# Altium PCB Relay Control.PcbDoc
Units mm, origin at the board's own origin, x right, y up, seen from the top; angles counter-clockwise.
Board outline 66.04 x 33.02 mm, 2 copper layers (Top Layer, Bottom Layer); 23 components, 10 nets, 58 pads, 4 vias.
Unrouted connection lines stored in the file: 14.
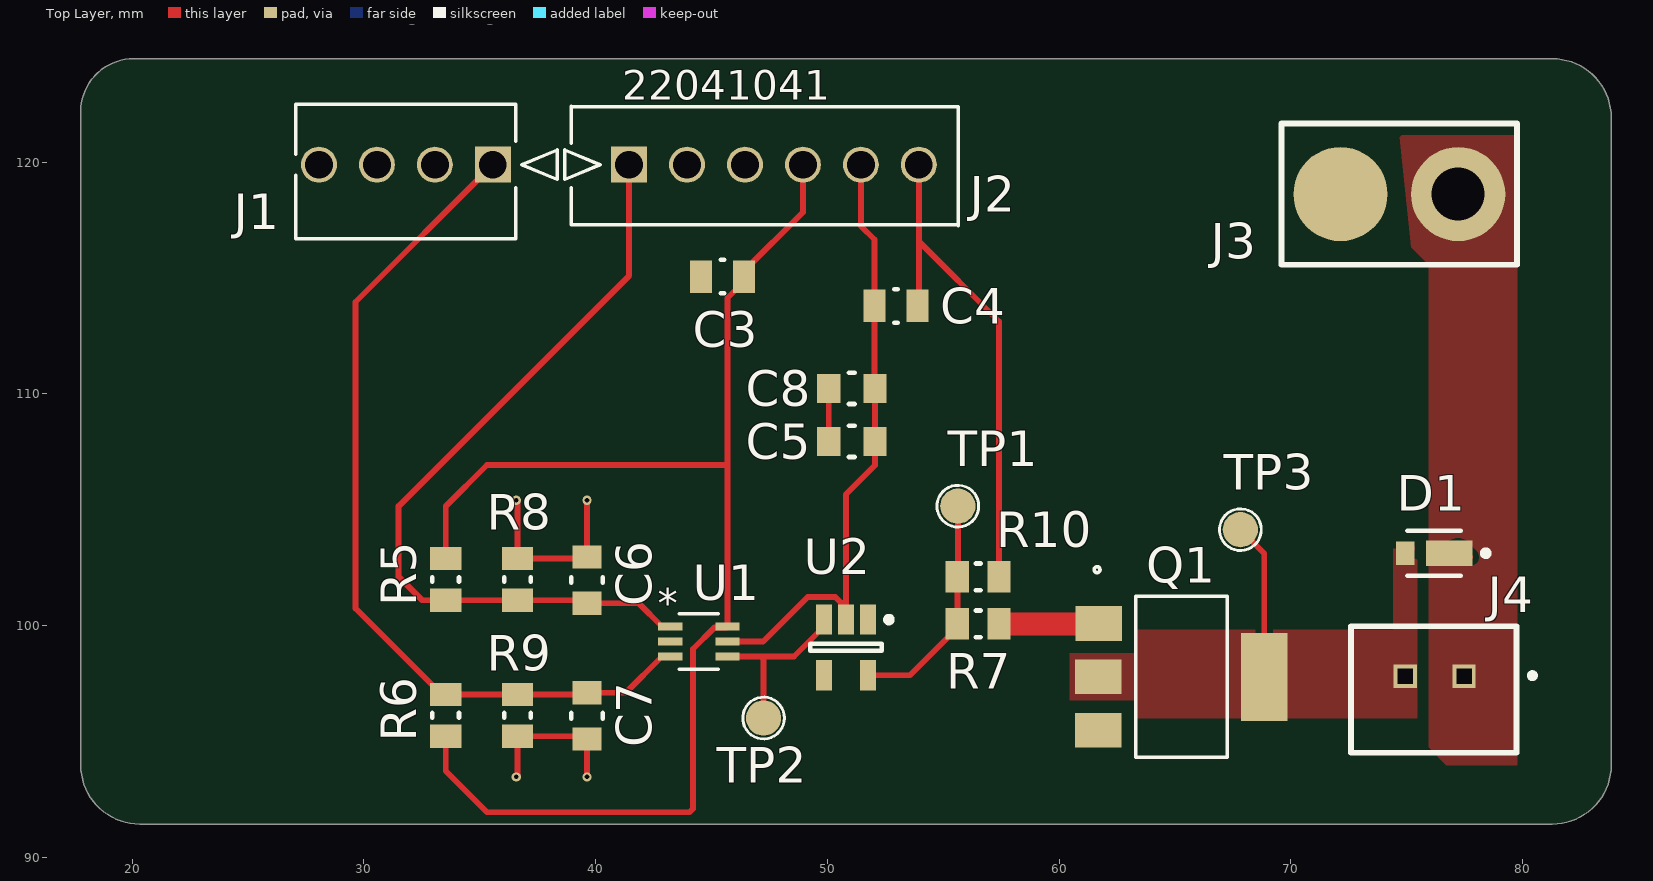
[diagram p0: Top Layer view]
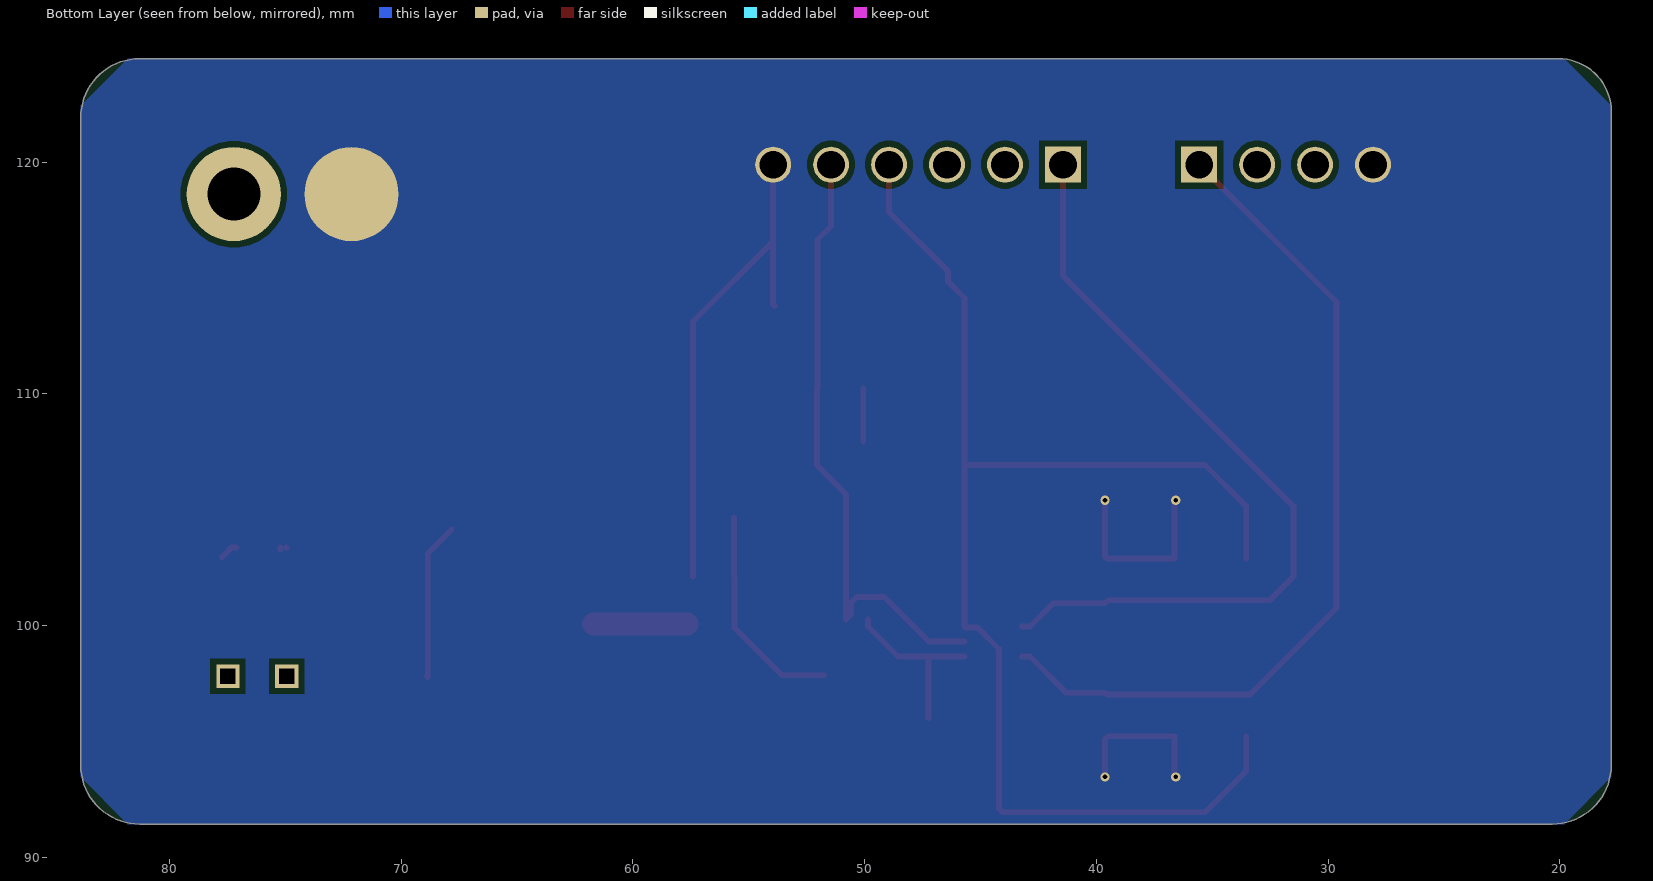
[diagram p1: Bottom Layer view, seen from below]
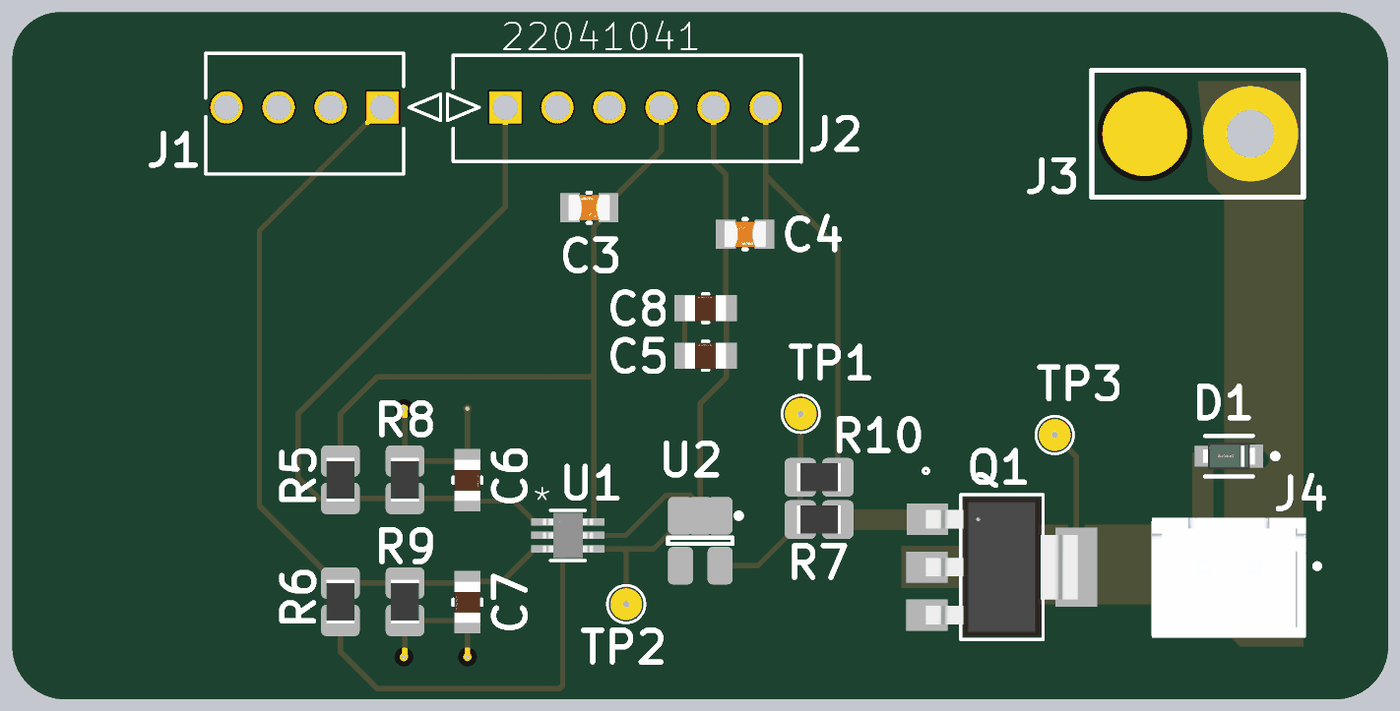
[diagram p2: 3D render of the assembled board from above, using the file's embedded part models]

## Layer stack, top to bottom
Top Solder: solder mask 0.0102, Solder Resist, Dk 3.5
Top Layer: signal copper 0.0356
Dielectric 1: dielectric 0.32, FR-4, Dk 4.8
Bottom Layer: signal copper 0.0356
Bottom Solder: solder mask 0.0102, Solder Resist, Dk 3.5

## Board outline
17.78,93.98 17.78,122.174 cw(c20.066,122.174) 20.066,124.46 81.28,124.46 cw(c81.28,121.92) 83.82,121.92 83.82,93.98 cw(c81.28,93.98) 81.28,91.44 20.32,91.44 cw(c20.32,93.98)

## Design rules (kind name [scope] priority, off if disabled: settings)
Clearance [All] p1: gap=0.254 ignorepadtopadclearanceinfootprint=FALSE except(0.127: Arc-Arc Arc-Track Track-Track SMDPad-SMDPad; 0.2: Arc-SMDPad Track-SMDPad)
DiffPairsRouting [All] p1: maxlimit=0.254 minlimit=0.254 mostfreqgap=0.254 toplayer_minwidth=0.254 toplayer_maxwidth=0.254 toplayer_prefwidth=0.254 bottomlayer_minwidth=0.254 bottomlayer_maxwidth=0.254 bottomlayer_prefwidth=0.254 maxuncoupledlength=12.7
HoleSize [IsVia] p1: absolutevalues=TRUE maxlimit=6.3 minlimit=0.15 maxpercent=80.000 minpercent=20.000
MinimumAnnularRing [All] p1: minimumring=0.254
PasteMaskExpansion [All] p1: expansion=0.254
PlaneClearance [All] p1: clearance=0.381
PlaneConnect [All] p1: pad.planeconnectstyle=Relief pad.reliefexpansion=0.508 pad.reliefentries=4 pad.reliefconductorwidth=0.254 pad.reliefairgap=0.254 via.planeconnectstyle=Direct via.reliefexpansion=0.508 via.reliefentries=4 via.reliefconductorwidth=0.254 via.reliefairgap=0.254
PolygonConnect [All] p1: connectstyle=Direct reliefconductorwidth=0.254 reliefentries=4 polygonreliefangle="90 Angle" airgapwidth=0.254
RoutingVias [All] p1: holewidth=0.2 width=0.4 viastyle="Through Hole" minholewidth=0.15 minwidth=0.25 maxholewidth=1 maxwidth=2
SMDNeckDown [All] p1: percent=300.000
SilkToSolderMaskClearance SilkscreenOverComponentPads [IsPad] p1: minsilkscreentomaskgap=0.254 clearancetoexposedcopper=TRUE
SolderMaskExpansion [All] p1: expansion=0.254 istentingtop=FALSE
SupplyNets "Schematic Supply Nets_4" [InNet('24V')] p1: voltage=0.000
SupplyNets "Schematic Supply Nets_2" [InNet('GND')] p2: voltage=0.000
SupplyNets "Schematic Supply Nets_1" [InNet('+5')] p3: voltage=0.000
SupplyNets "Schematic Supply Nets" [InNet('3V3')] p4: voltage=0.000
Width [All] p1: maxlimit=5.08 minlimit=0.127 preferedwidth=0.254 bottomlayer_minwidth=0.254 minimp=50.000000 maximp=50.000000 favimp=50.000000
24 further rules are at their usual default settings.

## Components (designator, comment, footprint, x,y, rotation, side; value= is the part's Value field where it differs from the comment)
C3 "CC0805KKX7R8BB105" FP-CC0805-0_85-MFG 45.466,115.062 r180 top value="1 uF"
C4 "CC0805KKX7R8BB105" FP-CC0805-0_85-MFG 52.954,113.792 r0 top value="1 uF"
C5 "HMK212B7104MG-T" FP-0805-L_2_0_0_1-W_1_25-MFG 51.054,107.95 r180 top
C6 "HMK212B7104MG-T" FP-0805-L_2_0_0_1-W_1_25-MFG 39.624,101.967 r90 top
C7 "HMK212B7104MG-T" FP-0805-L_2_0_0_1-W_1_25-MFG 39.624,96.103 r270 top
C8 "HMK212B7104MG-T" FP-0805-L_2_0_0_1-W_1_25-MFG 51.054,110.236 r180 top
D1 "NRVBSS14HE" FP-477AD-MFG 76.18,103.124 r180 top
J1 "4 pin Connector 2.5mm" "4 PIN CONNECTOR 2.5MM" 31.496,118.872 r0 top
J2 "6 pin Connector" "PLEASEWORK - 6 Pin connector 2.5mm spacing" 43.942,117.388 r180 top
J3 "XT60H-M" XT60H-M 74.676,118.618 r270 top
J4 "2PIN_PWR_SUPPLY" 2PIN_JST_CONNECTOR 76.2,97.79 r180 top
Q1 "FDT457N" "FDT457N MOSFET" 65.278,97.79 r270 top
R5 "RC0805FR-071KL" RESC2013X60X35NL10T20 33.528,101.992 r270 top
R6 "RC0805FR-071KL" RESC2013X60X35NL10T20 33.528,96.128 r90 top
R7 "RC0805FR-071KL" RESC2013X60X35NL10T20 56.504,100.076 r180 top
R8 "RC0805FR-0710KL" RESC2013X60X35NL10T20 36.626,101.992 r270 top
R9 "RC0805FR-0710KL" RESC2013X60X35NL10T20 36.626,96.128 r90 top
R10 "RC0805FR-071KL" RESC2013X60X35NL10T20 56.504,102.108 r180 top
TP1 "TEST_POINT" TEST_POINT 55.626,105.156 r90 top
TP2 "TEST_POINT" TEST_POINT 47.244,96.012 r90 top
TP3 "TEST_POINT" TEST_POINT 67.818,104.14 r90 top
U1 "SN74LVC1G11DCKR" "AND GATE" 44.45,99.314 r0 top
U2 "MCP1416T-E/OT" SOT-23-OT5_M 50.8,99.06 r270 top

## Footprints (in the part's own frame and the unit in brackets; to place one, negate y for a bottom-side part, rotate by r counter-clockwise, add the part's x,y. Pads: shape width x height; smd on the part's side, far side on the other; paste and mask are expansions set on the pad)
2PIN_JST_CONNECTOR [mm]
  rect 1x1 hole 0.65 square: 1(-1.27,-0.025) 2(1.27,-0.025)
  silkscreen extent -4.32,-2.18 3.61,3.28, body extent -3.67,-2.36 3.73,3.39, height 7
"4 PIN CONNECTOR 2.5MM" [mm]
  rect 1.55x1.55 / inner round 1.524 / far side rect 1.55x1.55 hole 1.2 paste-2539.97 mask+0.076: 1(4.064,1.016)
  round 1.55 / inner round 1.524 / far side round 1.55 hole 1.2 paste-2539.97 mask+0.076: 2(1.564,1.016) 3(-0.936,1.016) 4(-3.436,1.016)
  silkscreen extent -4.44,-2.18 6.84,3.62
"AND GATE" [mil]
  rect 41.5x14 smd paste+0 mask+0: 1(-48.75,25.59) 2(-48.75,0) 3(-48.75,-25.59) 4(48.75,-25.59) 5(48.75,0) 6(48.75,25.59)
  silkscreen extent -33,-48 33,48, body extent -48,-43 48,43, height 43
"FDT457N MOSFET" [mm]
  rect 1.5x2 smd paste+0 mask+0: 1(-2.3,-3.569) 2(0,-3.6) 3(2.3,-3.6)
  rect 3.8x2 smd paste+0 mask+0: 4(0,3.569)
  silkscreen extent -4.75,-3.77 3.48,1.98, body extent -3.35,-3.64 3.35,3.64, height 1.81
FP-477AD-MFG [mm]
  rect 2x1.1 smd paste+0 mask+0: 1(-0.65,0)
  rect 0.8x1 smd paste+0 mask+0: 2(1.25,0)
  silkscreen extent -2.35,-0.97 1.15,0.97, body extent -1.75,-0.8 1.75,0.8, height 0.25
FP-0805-L_2_0_0_1-W_1_25-MFG [mm]
  rect 1x1.25 smd paste+0 mask+0: 1(-1,0) 2(1,0)
  silkscreen extent -0.13,-0.67 0.13,0.67, body extent -1.6,-0.77 1.6,0.77, height 0.25
FP-CC0805-0_85-MFG [mm]
  rect 0.95x1.4 smd paste+0 mask+0: 1(-0.925,0) 2(0.925,0)
  silkscreen extent -0.08,-0.72 0.08,0.72, body extent -1.6,-1.05 1.6,1.05, height 0.25
"PLEASEWORK - 6 Pin connector 2.5mm spacing" [mm]
  rect 1.55x1.55 / inner round 1.524 / far side rect 1.55x1.55 hole 1.2 paste-2539.97 mask+0.076: 1(2.5,-2.5)
  round 1.55 / inner round 1.524 / far side round 1.55 hole 1.2 paste-2539.97 mask+0.076: 2(0,-2.5) 3(-2.5,-2.5) 4(-5,-2.5) 5(-7.5,-2.5) 6(-10,-2.5)
  silkscreen extent -11.71,-5.01 5.28,0.13
RESC2013X60X35NL10T20 [mm] "Chip Resistor, 2-Leads, Body 2.1x1.35mm, IPC Medium Density"
  rect 1x1.35 smd: 1(-0.9,0) 2(0.9,0)
  silkscreen extent -0.1,-0.58 0.1,0.58, body extent -1.05,-0.68 1.05,0.67, height 0.6
SOT-23-OT5_M [mm] "SOT23, 5-Leads, Body 2.9x1.7mm, Pitch 0.95mm, Lead Span 2.8mm, IPC Low Density"
  rect 1.3x0.7 smd: 1(-1.2,0.95) 2(-1.2,0) 3(-1.2,-0.95) 4(1.2,-0.95) 5(1.2,0.95)
  silkscreen extent -1.32,-1.55 0.15,1.98, body extent -0.9,-1.55 0.9,1.55, height 1.45
TEST_POINT [mil]
  round 60 smd paste-23.62 mask+0: 1(0,0)
  silkscreen extent -35,-35 35,35, body extent -24,-24 24,24, height 1
XT60H-M [mil]
  round 160 hole 90: 1(0,100)
  round 160 all layers, no hole: 2(0,-100)
  silkscreen extent -120,-200 120,200

## Part data
C3 C4: library part CMP-2100-03605-2, "CAP CER 1UF 25V X7R 0805", Capacitance="1 uF", Manufacturer=Yageo, Package=CC0805-0.85, Temperature="-30°C to +85°C", Temperature Characteristic=X7R, Temperature Range High=+85°C, Temperature Range Low=-30°C, Tolerance=0.1, Voltage Rating="25 V", Automotive=No, Category=Cap, ComponentLink2Description=Datasheet, ComponentLink2URL=http://www.yageo.com/documents/recent/UPY-GPHC_Y5V_6.3V-to-50V_8.pdf, Device Class L1="Passive Components", Device Class L2=Capacitors, Device Class L3="Ceramic Capacitors", Digikey Description="CAP CER 1UF 25V X7R 0805", Footprint Url=http://www.yageo.com/exep/pages/download/literatures/UPY-C_GEN_24.pdf, Height=0.95mm, Ipc Land Pattern Name=CAPC200125X85, Lead Free=Yes, Manufacturer Part Number=CC0805KKX7R8BB105, Material=Ceramic, Mouser Description="Multilayer Ceramic Capacitor, CC Series, 1 - F, - 10%, X7R, 25 V, 0805 [2012 Metric]", Octopart=https://octopart.com/cc0805kkx7r8bb105-yageo-42244645, RoHS=TRUE
C5 C6 C7 C8: library part CMP-14477-005100-2, "Multilayer Ceramic Capacitor 0.1 uF 100V X7R 20% SMD 0805 T/R", Capacitance=100nF, Case Code (Imperial)=0805, Case Code (Metric)=2012, Dielectric=X7R, Max Operating Temperature=125°C, Min Operating Temperature=-55°C, Package Quantity=3000, Resistor Type=Ceramic, Tolerance=20%, Voltage Rating=100V, Case/Package=0805, Construction=Flat, Depth=1.25mm, Halogen Free="Halogen Free", Height=1.25mm, Length=2mm, Mount="Surface Mount", Number of Pins=2, Packaging="Tape and Reel", Radiation Hardening=No, RoHS Compliant=Yes, Series=M, Termination=SMD/SMT, Thickness=0.053inch, Voltage Rating (DC)=100V, Width=0.049inch
D1: library part CMP-00278-93203856-2, "NRVBSS14HE Rectifier Diode, Schottky, 1 Phase, 1 Element, 1A, 40V V(RRM), Silicon", Capacitance=55pF, Forward Current=1A, Manufacturer Lifecycle Status=ACTIVE, Max Forward Surge Current (Ifsm)=25A, Max Junction Temperature (Tj)=150°C, Max Repetitive Reverse Voltage (Vrrm)=40V, Min Operating Temperature=-55°C, Peak Reverse Current=5µA, Height=750µm, Lifecycle Status=Production, Max Operating Temperature=150°C, NexarPartId=93203856, Reverse Voltage=40V, RoHS=Compliant
Q1: "No Description Available", Mfr_Name=onsemi, REFDES=RefDes, Type="Current Regulation - Diodes, Transistors"
R5 R6 R7 R10: library part CMP-2100-03671-1, "Chip Resistor, 1 KOhm, +/- 1%, 125 mW, -55 to 155 degC, 0805 (2012 Metric), RoHS, Tape and Reel", Case Code (Imperial)=0805, Case Code (Metric)=2012, Manufacturer=Yageo, Max Operating Temperature=155degC, Max Power Dissipation=125mW, Min Operating Temperature=-55degC, Package Description="2-Pin Surface Mounted Device, Body 2 x 1.25 mm", Package Quantity=1, Resistance=1KOhm, Temperature Coefficient=100ppm/degreesC, Tolerance=1%, Voltage Rating=150V, Case/Package=0805, Composition=ThickFilm, Datasheet URL=http://www.yageo.com/NewPortal/yageodocoutput?fileName=/pdf/R-Chip/PYu-RC_Group_51_RoHS_L_5.pdf, Datasheet Version="Rev. 5, 10/2016", Depth=1.25mm, Height=0.024inch, Lead Free=LeadFree, Length=0.079inch, Manufacturer URL=http://www.yageo.com/, Military Standard=Not, Number of Pins=2, Number of Terminations=2, Package Reference=0805, Packaging=TapeandReel, Power Rating=125mW, REACH SVHC=Unknown, RoHSCompliant=true, Termination=SMD/SMT, Voltage Rating (DC)=150V, Width=0.049inch
R8 R9: library part CMP-1659-00013-4, "Chip Resistor, 10 KOhm, +/- 1%, 0.125 W, -55 to 155 degC, 0805 (2012 Metric), RoHS, Tape and Reel", Manufacturer=Yageo, Max Operating Temperature="155 degC", Min Operating Temperature="-55 degC", Package Quantity=5000, Voltage Rating="150 V", ComponentLink1Description="Manufacturer URL", ComponentLink1URL=http://www.yageo.com/, ComponentLink2Description=Datasheet, ComponentLink2URL=http://www.yageo.com/documents/recent/PYu-RC_Group_51_RoHS_L_04.pdf, DatasheetVersion="Rev. 4, 02/2016", Height="0.5 mm", Length="2 mm", Mount="Surface Mount", Mounting Technology="Surface Mount", PackageDescription="2-Pin Surface Mounted Device, Body 2 x 1.25 mm", PackageReference=0805, Packaging="Tape and Reel", Pins=2, REACH SVHC="No SVHC", RoHSCompliant=true
TP1 TP2 TP3: library part TESTING_POINT
U1: "No Description Available", Mfr_Name="Texas Instruments", REFDES=RefDes, Type=Type
U2: library part CMP-0137-00410-1, "Tiny 1.5A, High-Speed Power MOSFET Driver, Non Inverting, Extended Temperature, Tape and Reel", Code_IPC=SOT23-5, DatasheetVersion="revC, Dec-2008", PackageDescription="5-Lead Plastic Small Outline Transistor (OT) [SOT-23]", PackageReference=SOT-23-OT5, PackageVersion="revBB, Aug-2009"
J4: Mounting type="Through Hole", Number of Positions=2

## Via types
v1: diameter 0.4, hole 0.2, Top Layer to Bottom Layer, 3 vias
v2: diameter 0.4, hole 0.2, Top Layer to Bottom Layer, tented both sides, 1 vias

## Nets (pads, with @x,y where several pads share a name; then routed paths per layer and width w, separated by ;. In a path a pad name is that pad's centre, name@x,y a point inside that pad or via, vN(x,y) a via of type N, cw(c..) or ccw(c..) an arc to the next point about the centre after c; other vN are vias at no path point)
3V3: C3.1 J2.4 R5.1 R6.1 U1.6 | length 58.2
  Top Layer w0.254: R6.1 33.528,93.726 35.306,91.948 44.047,91.948 44.196,92.097 44.196,98.989 45.12,99.913 45.637,99.913 U1.6 45.688,106.934 ; R5.1 33.528,105.156 35.306,106.934 45.688,106.934 ; J2.4 48.942,117.838 46.391,115.287 C3.1 46.391,114.837 45.688,114.134 45.688,106.934
24V: D1.1 J3.1 J4.1 | length 0.8
  Top Layer w0.254: D1.1@77.104,103.378 77.301,103.378 D1.1@77.724,102.955
+5: C4.1 C5.1 C8.1 J2.5 U1.5 U2.2 | length 27
  Top Layer w0.254: U1.5 47.225,99.314 49.148,101.237 50.335,101.237 50.577,100.995 50.577,100.483 U2.2 50.8,105.664 52.054,106.918 C5.1 C8.1 52.029,110.261 C4.1 52.029,116.658 51.442,117.245 J2.5
GND: C3.2 C4.2 C5.2 C6.2 C7.2 C8.2 J1.4 J2.6 J3.2 Q1.3 R8.1 R9.1 R10.1 U1.2 U2.4 | length 39.3
  Top Layer w0.254: v1(36.576,93.472) 36.576,93.512 36.626,93.562 R9.1 39.499,95.228 C7.2 v1(39.624,93.472) ; v1(36.576,105.41) 36.626,105.36 R8.1 39.549,102.892 C6.2 v2(39.624,105.41) ; C5.2 C8.2 ; C4.2 53.942,113.855 53.942,116.586 ; J2.6 53.942,116.586 ; R10.1 57.404,113.124 53.942,116.586 ; J3.2@71.755,118.999 J3.2
NetD1_2: D1.2 J4.2 Q1.2 Q1.4 TP3.1 | length 6.9
  Top Layer w0.254: TP3.1 68.847,103.111 Q1.4 Q1.4@68.872,97.815 ; D1.2@74.93,103.358 D1.2@74.95,103.378 ; D1.2@75.204,103.278 D1.2@75.204,103.378
NetQ1_1: Q1.1 R7.1 | length 4.5
  Top Layer w0.254: R7.1 57.658,100.076 R7.1@57.658,100.251 ; Q1.1@61.695,100.076 Q1.1
  Top Layer w1: R7.1@57.658,100.076 Q1.1@61.695,100.076
NetR7_2: R7.2 R10.2 TP1.1 U2.5 | length 9.5
  Top Layer w0.254: U2.5 53.563,97.86 55.604,99.901 R7.2 R10.2 55.626,102.13 TP1.1@55.626,104.648
NetTP2_1: TP2.1 U1.4 U2.3 | length 7.7
  Top Layer w0.254: U1.4 47.121,98.664 ; TP2.1 47.244,98.541 47.121,98.664 ; U2.3 49.85,99.96 48.554,98.664 47.121,98.664
PRE_RELAY_ON: C6.1 J2.1 R5.2 R8.2 U1.1 | length 34.5
  Top Layer w0.254: J2.1 41.442,115.102 31.496,105.156 31.496,102.108 32.512,101.092 R8.2 39.499,101.092 C6.1 41.859,100.967 42.862,99.964 U1.1
"RPI PRE_RELAY_ON": C7.1 J1.1 R6.2 R9.2 U1.3 | length 37.4
  Top Layer w0.254: J1.1 29.638,113.966 29.638,100.743 33.353,97.028 R6.2 R9.2 39.549,97.028 C7.1 41.302,97.103 42.862,98.664 U1.3
pads on no net: J1.2 J1.3 J2.2 J2.3 U2.1

## Polygon pours and split planes (outlines as drawn)
NetD1_2 on Top Layer "NETD1_2_L01_P001" (solid, pour order 1): 63.246,96.012 75.438,96.012 75.438,103.886 74.422,103.886 74.422,99.822 63.246,99.822 63.246,98.806 60.452,98.806 60.452,96.774 63.246,96.774
24V on Top Layer "24V_L01_P000" (solid, pour order 0): 74.676,121.158 79.756,121.158 79.756,93.98 76.708,93.98 75.946,94.742 75.946,115.57 75.184,116.332
GND on Bottom Layer "GND_L02_P003" (solid, remove dead copper, pour order 3): 81.788,124.46 19.812,124.46 17.78,122.428 17.78,93.472 19.812,91.44 81.788,91.44 83.82,93.472 83.82,122.428

## Silkscreen, mask and mechanical layers (free items; w line width, h text height)
Mechanical 1:
  the board outline again, w0.254

## Text inside footprints (layer, text, board x,y; h text height)
J1: Top 3D Body "22041041" at 29.27,125.938 h1.27; Top Overlay "22041041" at 29.27,125.938 h1.27
J2: Top 3D Body "22041041" at 41.148,122.682 h1.27; Top Overlay "22041041" at 41.148,122.682 h1.27
U1: Top 3D Body "*" at 43.802,99.047 h1.27; Top Overlay "*" at 42.672,100.33 h1.27